# Altium PCB PCB2.PcbDoc (part 1 of 2)
Units mm, origin at the board's own origin, x right, y up, seen from the top; angles counter-clockwise.
Board outline 100 x 150 mm, 2 copper layers (Top Layer, Bottom Layer), stack 1.569 mm thick; 187 components, 138 nets, 678 pads, 332 vias.
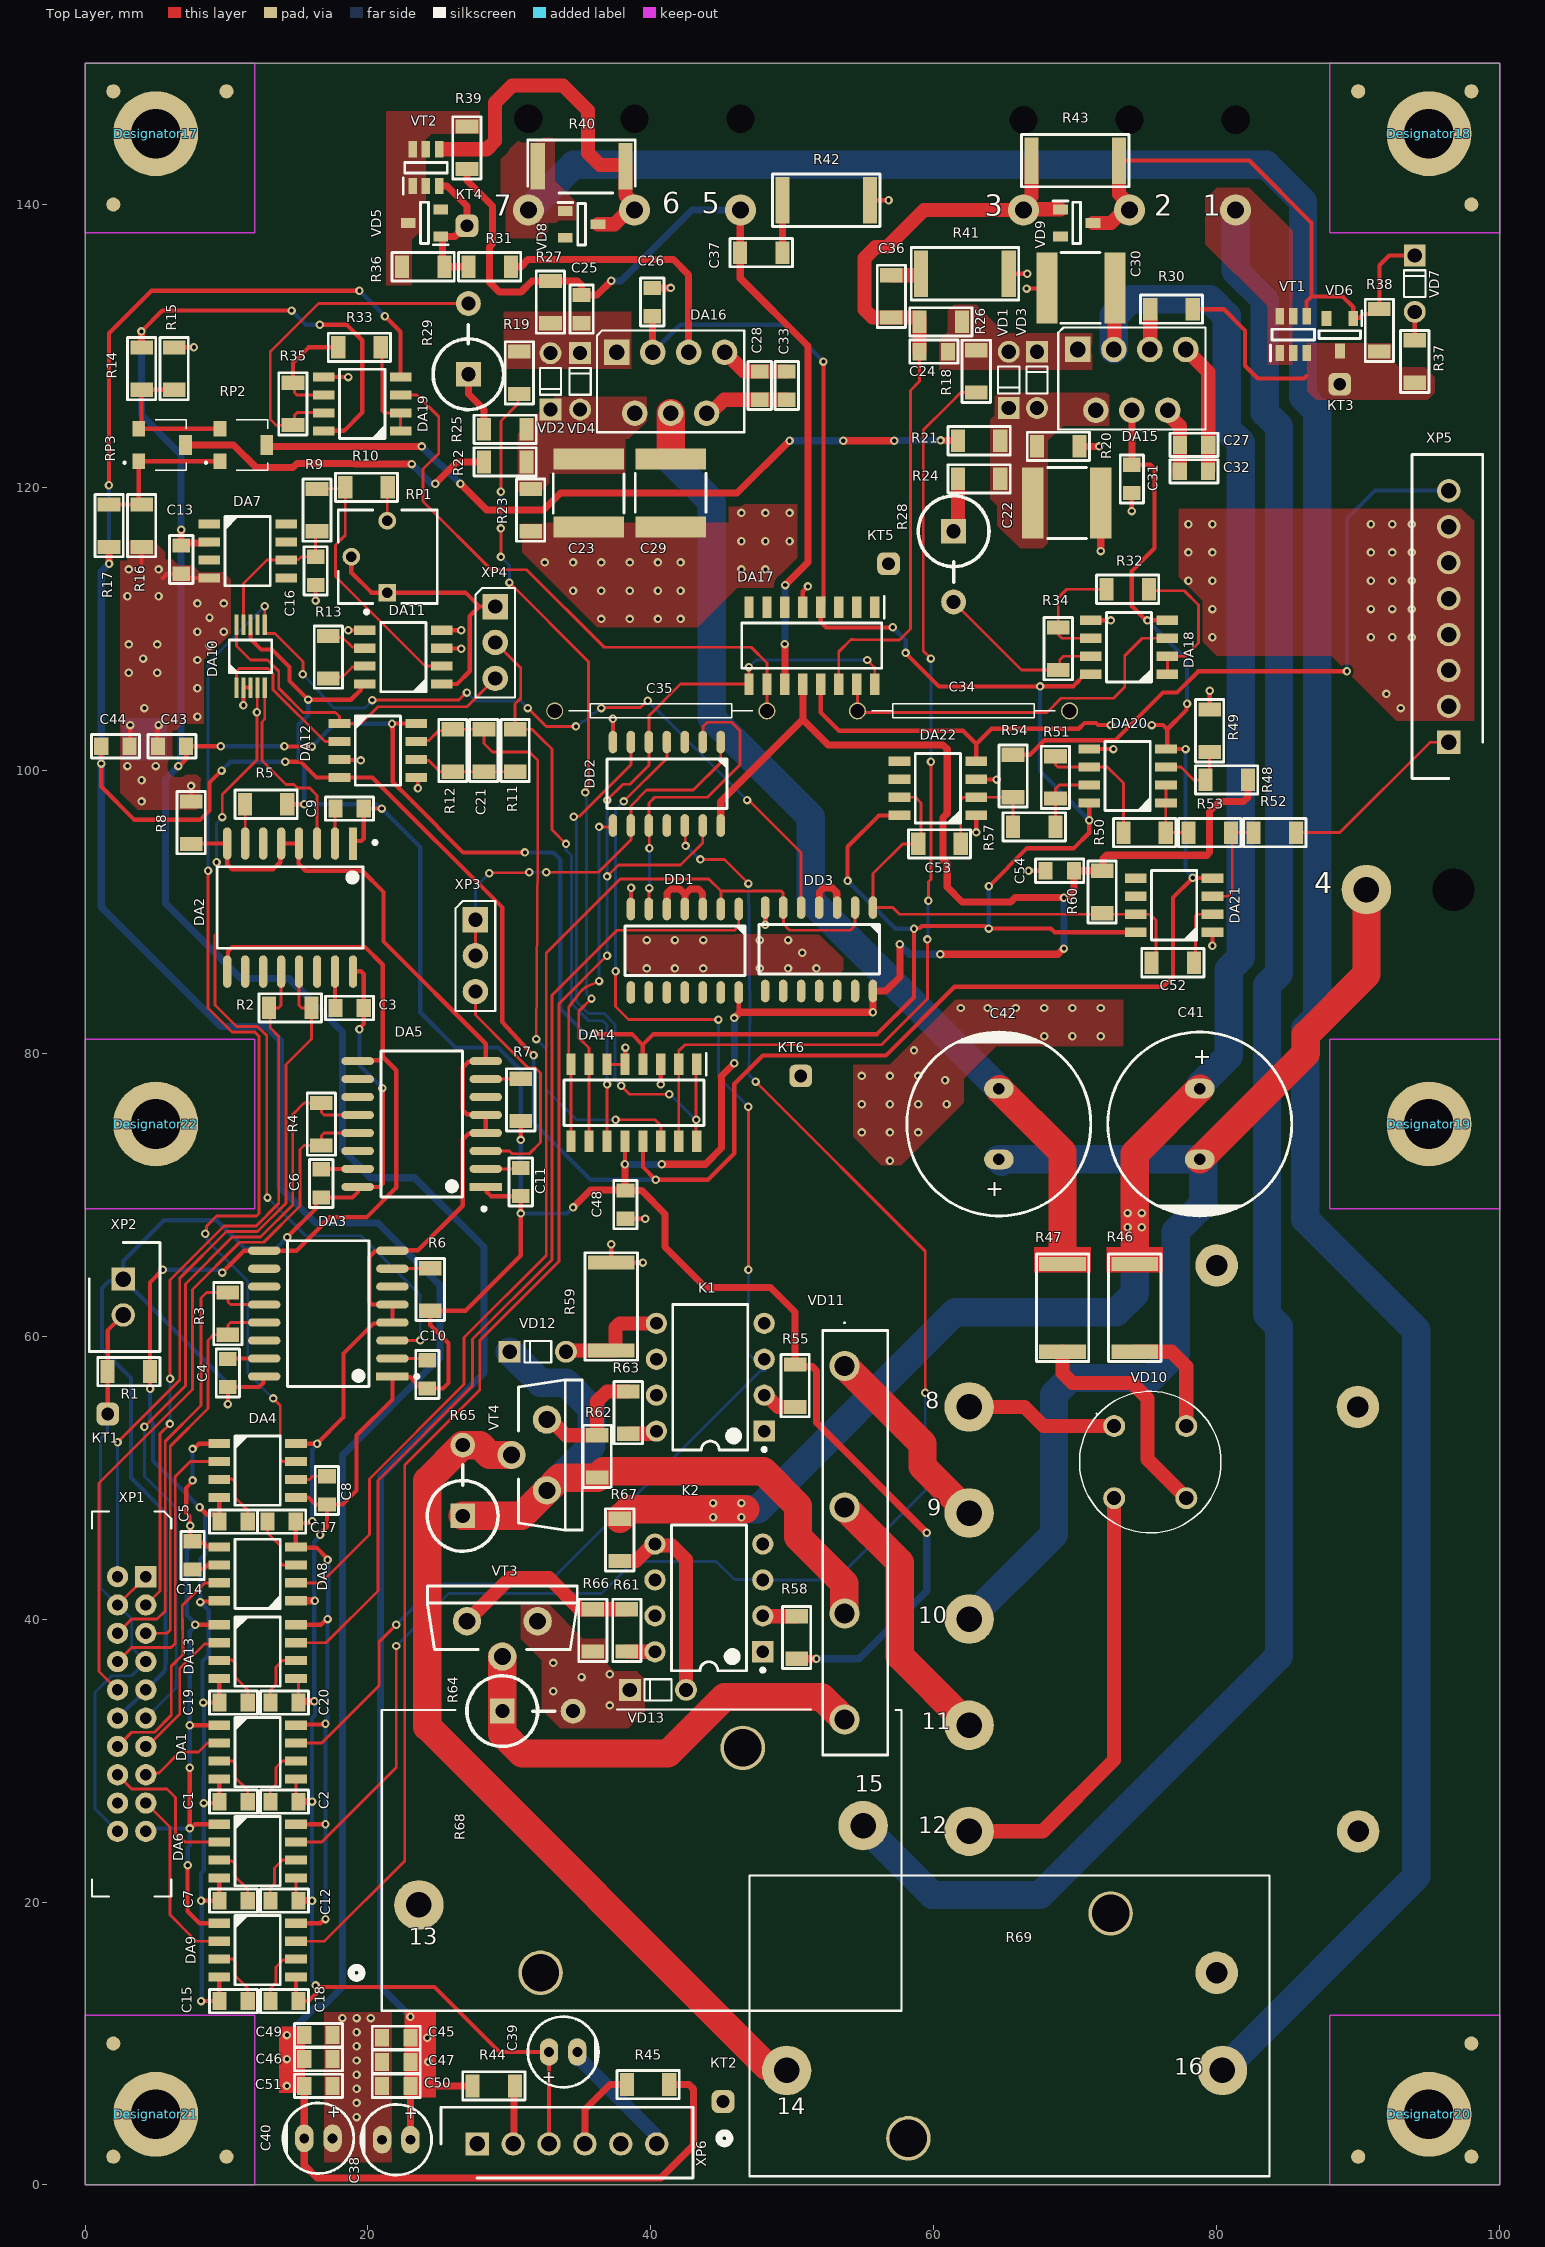
[diagram p0: Top Layer view]
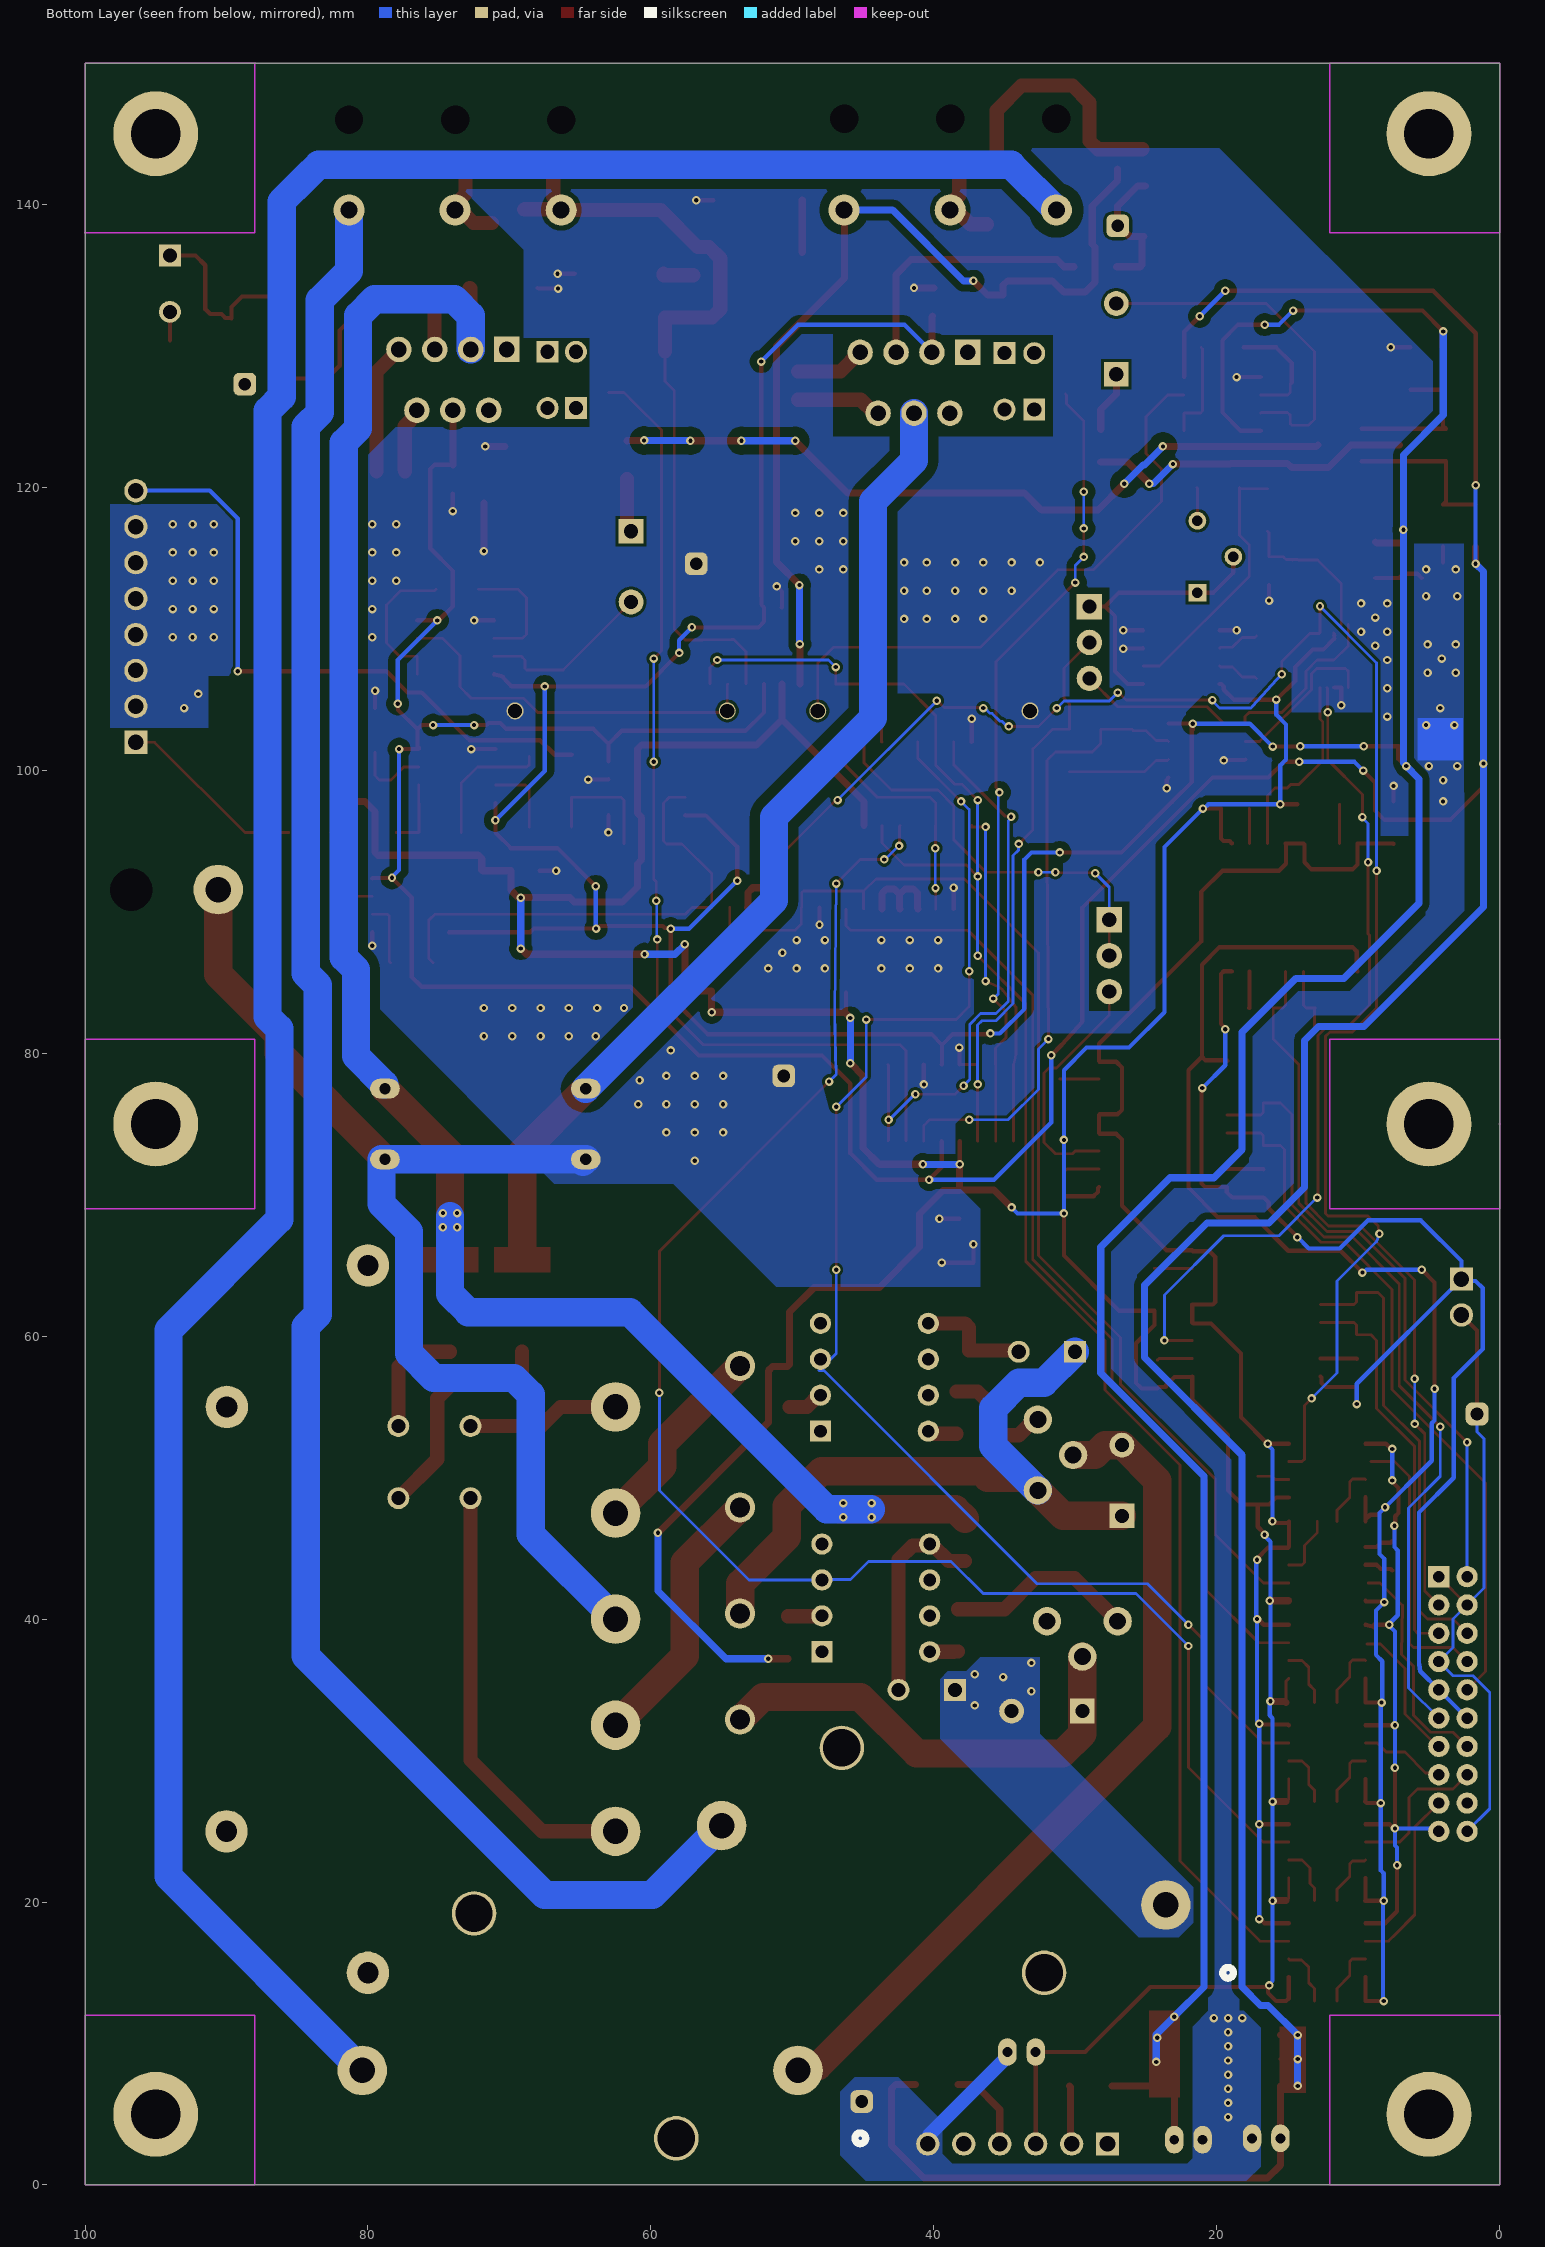
[diagram p1: Bottom Layer view, seen from below]
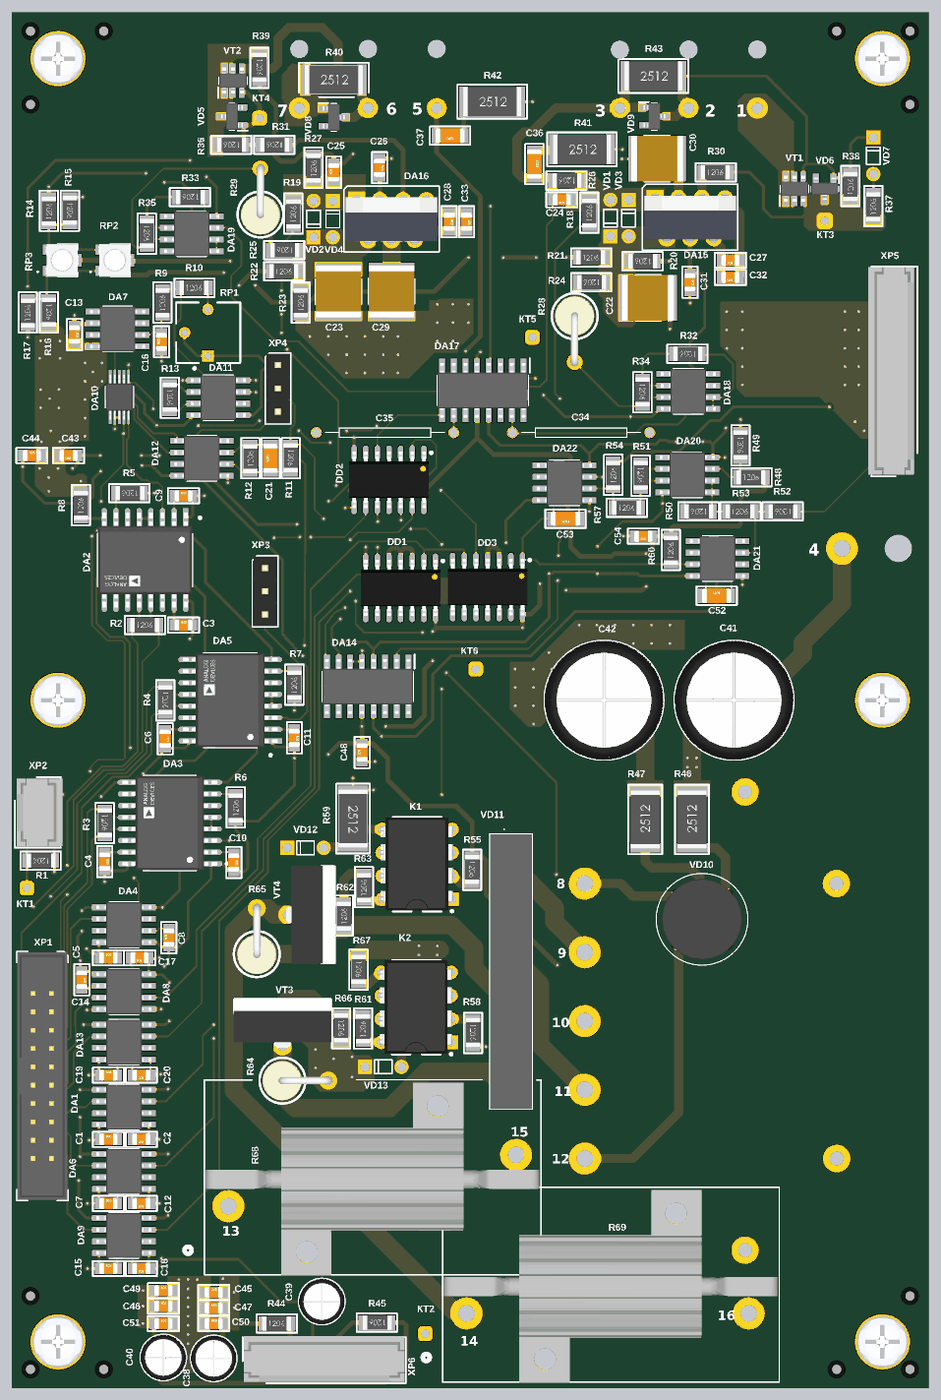
[diagram p3: 3D render of the assembled board from above, using the file's embedded part models]

## Layer stack, top to bottom
Top Solder: solder mask 0.0254, SM-001, Dk 4
Top Layer: signal copper 0.035
Dielectric 1: core 1.4986, Core-043, Dk 4.3
Bottom Layer: signal copper 0.035
Bottom Solder: solder mask 0.0254, SM-001, Dk 4

## Board outline
0,0 0,150 100,150 100,0

## Design rules (kind name [scope] priority, off if disabled: settings)
Clearance Clearance_1 [(InNet('-100') or InNet('-70') or InNet('+70') or InNet('+100')or InNet('NetR21_1'))] p1: gap=0.7 ignorepadtopadclearanceinfootprint=TRUE except(0.5: Arc-SMDPad Arc-THPad Track-SMDPad Track-THPad SMDPad-SMDPad SMDPad-THPad THPad-THPad)
Clearance Clearance_3 [InComponent('DA10')] p2: gap=0.2 ignorepadtopadclearanceinfootprint=TRUE
Clearance Clearance_2 [(InNet('+3.3n') or InNet('-15') or InNet('+5') or InNet('+15') or InNet('+5n')or InNet('Net5') or InNet('S-'))] p3: gap=0.5 ignorepadtopadclearanceinfootprint=TRUE except(0.3: Arc-SMDPad Track-SMDPad)
Clearance [All] p4: gap=0.15 ignorepadtopadclearanceinfootprint=TRUE except(0.2: Arc-Fill Arc-Poly Arc-Region Track-Fill Track-Poly Track-Region SMDPad-Fill SMDPad-Poly SMDPad-Region THPad-Fill THPad-Poly THPad-Region Via-Fill Via-Poly Via-Region Fill-Fill Fill-Poly Fill-Region Poly-Poly Poly-Region Region-Region)
Height [All] p1: minheight=0 maxheight=40 prefheight=12.7
HoleSize [All] p1: absolutevalues=TRUE maxlimit=5 minlimit=0.025 maxpercent=80.000 minpercent=20.000
MinimumSolderMaskSliver [All] p1: minsoldermaskwidth=0.1
PlaneClearance [All] p1: clearance=0.5
PlaneConnect [All] p1: planeconnectstyle=Direct reliefexpansion=0.508 reliefentries=4 reliefconductorwidth=0.254 reliefairgap=0.254
PolygonConnect [All] p1: connectstyle=Direct reliefconductorwidth=0.254 reliefentries=4 polygonreliefangle="90 Angle" airgapwidth=0.254
RoutingVias [All] p1: holewidth=0.3 width=0.6 viastyle="Through Hole" minholewidth=0.3 minwidth=0.6 maxholewidth=0.8 maxwidth=1.5
SilkToSilkClearance [All] p1: silktosilkclearance=0.1
SilkToSolderMaskClearance [IsPad] p1: minsilkscreentomaskgap=0.1 clearancetoexposedcopper=TRUE
SolderMaskExpansion [All] p1: expansion=0.102 istentingtop=FALSE
SupplyNets "Schematic Supply Nets_31" [InNet('70+')] p1: voltage=0.000
SupplyNets "Schematic Supply Nets_30" [InNet('LIMITn')] p2: voltage=0.000
SupplyNets "Schematic Supply Nets_29" [InNet('-70')] p3: voltage=0.000
SupplyNets "Schematic Supply Nets_28" [InNet('-15')] p4: voltage=0.000
SupplyNets "Schematic Supply Nets_27" [InNet('+3.3n')] p5: voltage=0.000
SupplyNets "Schematic Supply Nets_26" [InNet('IMPc')] p6: voltage=0.000
SupplyNets "Schematic Supply Nets_25" [InNet('50E+')] p7: voltage=0.000
SupplyNets "Schematic Supply Nets_24" [InNet('LM+')] p8: voltage=0.000
SupplyNets "Schematic Supply Nets_23" [InNet('CLK_DA2')] p9: voltage=0.000
SupplyNets "Schematic Supply Nets_22" [InNet('GNDR')] p10: voltage=0.000
SupplyNets "Schematic Supply Nets_21" [InNet('GNDN')] p11: voltage=0.000
SupplyNets "Schematic Supply Nets_20" [InNet('-100')] p12: voltage=0.000
SupplyNets "Schematic Supply Nets_19" [InNet('OVLI,2n')] p13: voltage=0.000
SupplyNets "Schematic Supply Nets_18" [InNet('OVLI,2')] p14: voltage=0.000
SupplyNets "Schematic Supply Nets_17" [InNet('DAT_DA2')] p15: voltage=0.000
SupplyNets "Schematic Supply Nets_16" [InNet('ENB_DA2')] p16: voltage=0.000
SupplyNets "Schematic Supply Nets_15" [InNet('50En+')] p17: voltage=0.000
SupplyNets "Schematic Supply Nets_14" [InNet('S-')] p18: voltage=0.000
SupplyNets "Schematic Supply Nets_13" [InNet('+15')] p19: voltage=0.000
SupplyNets "Schematic Supply Nets_12" [InNet('+70')] p20: voltage=0.000
SupplyNets "Schematic Supply Nets_11" [InNet('50En-')] p21: voltage=0.000
SupplyNets "Schematic Supply Nets_10" [InNet('EIMPn')] p22: voltage=0.000
SupplyNets "Schematic Supply Nets_9" [InNet('+5')] p23: voltage=0.000
SupplyNets "Schematic Supply Nets_8" [InNet('GND')] p24: voltage=0.000
SupplyNets "Schematic Supply Nets_7" [InNet('LIMIT')] p25: voltage=0.000
SupplyNets "Schematic Supply Nets_6" [InNet('+100')] p26: voltage=0.000
SupplyNets "Schematic Supply Nets_5" [InNet('LM-')] p27: voltage=0.000
SupplyNets "Schematic Supply Nets_4" [InNet('+5n')] p28: voltage=0.000
SupplyNets "Schematic Supply Nets_3" [InNet('EIMP')] p29: voltage=0.000
SupplyNets "Schematic Supply Nets_2" [InNet('S+')] p30: voltage=0.000
SupplyNets "Schematic Supply Nets_1" [InNet('70-')] p31: voltage=0.000
SupplyNets "Schematic Supply Nets" [InNet('50E-')] p32: voltage=0.000
Width [All] p1: maxlimit=2 minlimit=0.2 preferedwidth=0.3
23 further rules are at their usual default settings.

## Classes and differential pairs
component class Sheet3: 8 9 10 11 12 C38 C39 C40 C41 C42 C43 C44 C45 C46 C47 C48 C49 C50 C51 C52 C53 C54 DA20 DA21 DA22 DD3 K1 K2 R44 R45 R46 R47 R48 R49 R50 R51 R52 R53 R54 R55 R57 R58 R59 R60 R61 R62 R63 R64 R65 R66 R67 R68 R69 VD10 VD11 VD12 VD13 VT3 VT4 XP5 XP6 XS3 КТ5 КТ6
component class Sheet2: 1 2 3 4 5 6 7 C22 C23 C24 C25 C26 C27 C28 C29 C30 C31 C32 C33 C34 C35 C36 C37 DA15 DA16 DA17 DA18 DA19 R14 R15 R16 R17 R18 R19 R20 R21 R22 R23 R24 R25 R26 R27 R28 R29 R30 R31 R32 R33 R34 R35 R36 R37 R38 R39 R40 R41 R42 R43 RP2 RP3 VD1 VD2 VD3 VD4 VD5 VD6 VD7 VD8 VD9 VT1 VT2 КТ3 КТ4
component class Sheet1: C1 C2 C3 C4 C5 C6 C7 C8 C9 C10 C11 C12 C13 C14 C15 C16 C17 C18 C19 C20 C21 DA1 DA2 DA3 DA4 DA5 DA6 DA7 DA8 DA9 DA10 DA11 DA12 DA13 DA14 DD1 DD2 R1 R2 R3 R4 R5 R6 R7 R8 R9 R10 R11 R12 R13 RP1 XP1 XP2 XP3 XP4 XS1 XS2 КТ1 КТ2

## Components (designator, comment, footprint, x,y, rotation, side; value= is the part's Value field where it differs from the comment)
C1 "0805-X7R-25 В-0,1 мкФ +-10%" "CAP: 0805" 10.5,27.1 r0 top value="0,1 мкФ"
C2 "0805-X7R-25 В-0,1 мкФ +-10%" "CAP: 0805" 14.1,27.1 r180 top value="0,1 мкФ"
C3 "0805-X7R-25 В-0,1 мкФ +-10%" "CAP: 0805" 18.7,83.2 r0 top value="0,1 мкФ"
C4 "0805-X7R-25 В-0,1 мкФ +-10%" "CAP: 0805" 10.1,57.4 r270 top value="0,1 мкФ"
C5 "0805-X7R-25 В-0,1 мкФ +-10%" "CAP: 0805" 10.5,46.9 r0 top value="0,1 мкФ"
C6 "0805-X7R-25 В-0,1 мкФ +-10%" "CAP: 0805" 16.7,70.8 r270 top value="0,1 мкФ"
C7 "0805-X7R-25 В-0,1 мкФ +-10%" "CAP: 0805" 10.5,20.1 r0 top value="0,1 мкФ"
C8 "0805-X7R-25 В-0,1 мкФ +-10%" "CAP: 0805" 17.1,49.1 r90 top value="0,1 мкФ"
C9 "0805-X7R-25 В-0,1 мкФ +-10%" "CAP: 0805" 18.7,97.3 r0 top value="0,1 мкФ"
C10 "0805-X7R-25 В-0,1 мкФ +-10%" "CAP: 0805" 24.2,57.3 r270 top value="0,1 мкФ"
C11 "0805-X7R-25 В-0,1 мкФ +-10%" "CAP: 0805" 30.8,70.9 r270 top value="0,1 мкФ"
C12 "0805-X7R-25 В-0,1 мкФ +-10%" "CAP: 0805" 14.1,20.1 r180 top value="0,1 мкФ"
C13 "0805-X7R-25 В-0,1 мкФ +-10%" "CAP: 0805" 6.8,114.9 r270 top value="0,1 мкФ"
C14 "0805-X7R-25 В-0,1 мкФ +-10%" "CAP: 0805" 7.6,44.5 r270 top value="0,1 мкФ"
C15 "0805-X7R-25 В-0,1 мкФ +-10%" "CAP: 0805" 10.5,13 r0 top value="0,1 мкФ"
C16 "0805-X7R-25 В-0,1 мкФ +-10%" "CAP: 0805" 16.3,114.1 r90 top value="0,1 мкФ"
C17 "0805-X7R-25 В-0,1 мкФ +-10%" "CAP: 0805" 13.9,46.9 r180 top value="0,1 мкФ"
C18 "0805-X7R-25 В-0,1 мкФ +-10%" "CAP: 0805" 14.1,13 r180 top value="0,1 мкФ"
C19 "0805-X7R-25 В-0,1 мкФ +-10%" "CAP: 0805" 10.5,34.1 r0 top value="0,1 мкФ"
C20 "0805-X7R-25 В-0,1 мкФ +-10%" "CAP: 0805" 14.1,34.1 r180 top value="0,1 мкФ"
C21 "1206-C0G-50 В-22 пФ +-5%" "CAP: 1206" 28.2,101.4 r90 top value="22 пФ"
C22 "2220-X7R-250 В-1 мкФ +-10%" "CAP: 2220" 71.8,118.9 r270 top value="1 мкФ"
C23 "2220-X7R-250 В-1 мкФ +-10%" "CAP: 2220" 35.6,117.2 r180 top value="1 мкФ"
C24 "0805-C0G-250 В-10 пФ +-5%" "CAP: 0805" 60,129.6 r180 top value="10 пФ"
C25 "0805-C0G-250 В-10 пФ +-5%" "CAP: 0805" 35.1,132.6 r90 top value="10 пФ"
C26 "0805-X7R-25 В-1 мкФ +-10%" "CAP: 0805" 40.1,133.1 r270 top value="1 мкФ"
C27 "0805-C0G-250 В-10 пФ +-5%" "CAP: 0805" 78.4,123 r180 top value="10 пФ"
C28 "0805-C0G-250 В-10 пФ +-5%" "CAP: 0805" 47.7,127.2 r270 top value="10 пФ"
C29 "2220-X7R-250 В-1 мкФ +-10%" "CAP: 2220" 41.4,122 r0 top value="1 мкФ"
C30 "2220-X7R-250 В-1 мкФ +-10%" "CAP: 2220" 68,134.1 r90 top value="1 мкФ"
C31 "0805-X7R-25 В-1 мкФ +-10%" "CAP: 0805" 74,120.6 r270 top value="1 мкФ"
C32 "0805-C0G-250 В-10 пФ +-5%" "CAP: 0805" 78.39,121.133 r180 top value="10 пФ"
C33 "0805-C0G-250 В-10 пФ +-5%" "CAP: 0805" 49.6,127.2 r270 top value="10 пФ"
C34 "К73-17-160 В-1 мкФ +-10%" К73-17-A15 69.6,104.2 r180 top
C35 "К73-17-160 В-1 мкФ +-10%" К73-17-A15 33.2,104.2 r0 top
C36 "1206-X7R-250 B-0,1 мкФ+-10%" "CAP: 1206" 57,133.5 r270 top value="2,2 пФ"
C37 "1206-X7R-250 B-0,1 мкФ+-10%" "CAP: 1206" 47.8,136.6 r180 top value="2,2 пФ"
C38 "ECR4R7M50B" "CAP TH ALUM ELEC D5.00mm S2.00mm H11.00mm" 22,3.2 r0 top value="4,7 мкФ"
C39 "ECR4R7M50B" "CAP TH ALUM ELEC D5.00mm S2.00mm H11.00mm" 33.8,9.4 r180 top value="4,7 мкФ"
C40 "ECR4R7M50B" "CAP TH ALUM ELEC D5.00mm S2.00mm H11.00mm" 16.5,3.3 r0 top value="4,7 мкФ"
C41 "EHR-250B-47 мкФ" "CAP TH ALUM ELEC D13.00mm S5.00mm H26.50mm" 78.8,75 r270 top
C42 "EHR-250B-47 мкФ" "CAP TH ALUM ELEC D13.00mm S5.00mm H26.50mm" 64.6,75 r90 top
C43 "0805-X7R-25 В-0,33 мкФ +-10%" "CAP: 0805" 6.15,101.7 r180 top value="0,33 мкФ"
C44 "0805-X7R-25 В-0,33 мкФ +-10%" "CAP: 0805" 2.15,101.7 r0 top value="0,33 мкФ"
C45 "0805-X7R-25 В-0,33 мкФ +-10%" "CAP: 0805" 22,10.4 r0 top value="0,33 мкФ"
C46 "0805-X7R-25 В-0,33 мкФ +-10%" "CAP: 0805" 16.5,8.9 r0 top value="0,33 мкФ"
C47 "0805-X7R-25 В-0,33 мкФ +-10%" "CAP: 0805" 22,8.7 r0 top value="0,33 мкФ"
C48 "0805-X7R-25 В-0,33 мкФ +-10%" "CAP: 0805" 38.2,69.3 r90 top value="0,33 мкФ"
C49 "0805-X7R-25 В-0,33 мкФ +-10%" "CAP: 0805" 16.5,10.6 r0 top value="0,33 мкФ"
C50 "0805-X7R-25 В-0,33 мкФ +-10%" "CAP: 0805" 22,7 r0 top value="0,33 мкФ"
C51 "0805-X7R-25 В-0,33 мкФ +-10%" "CAP: 0805" 16.5,7 r0 top value="0,33 мкФ"
C52 "1206-X7R-50 B-22 пФ+-10%" "CAP: 1206" 76.9,86.4 r0 top value="2,2 пФ"
C53 "1206-X7R-50 B-22 пФ+-10%" "CAP: 1206" 60.4,94.8 r180 top value="2,2 пФ"
C54 "0805-X7R-25 В-0,33 мкФ +-10%" "CAP: 0805" 68.9,92.9 r180 top value="0,33 мкФ"
DA1 "ADuM1100AR" 8-SOIC 12.2,30.6 r0 top
DA2 "ADM2486BRWZ" "16-SOIC W" 14.5,90.3 r270 top
DA3 "ADM2486BRWZ" "16-SOIC W" 17.2,61.6 r180 top
DA4 "ADuM1100AR" 8-SOIC 12.2,50.5 r0 top
DA5 "ADM2486BRWZ" "16-SOIC W" 23.8,75 r180 top
DA6 "ADuM1100AR" 8-SOIC 12.2,23.6 r0 top
DA7 "ADR435BRZ" 8-SOIC 11.5,115.5 r0 top
DA8 "ADuM1100AR" 8-SOIC 12.2,43.2 r180 top
DA9 "ADuM1100AR" 8-SOIC 12.2,16.6 r0 top
DA10 "AD5443YRM" 10-MSOP 11.7,108.075 r90 top
DA11 "ADA4084-2ARZ" 8-SOIC 22.5,108 r180 top
DA12 "ADA4084-2ARZ" 8-SOIC 20.7,101.4 r0 top
DA13 "ADuM1100AR" 8-SOIC 12.2,37.7 r0 top
DA14 "ADG433BR" 16-SOIC 38.8,76.5 r270 top
DA15 "PA340CC" "D2PAK (TO263-7-1)" 74,127.7 r0 top
DA16 "PA340CC" "D2PAK (TO263-7-1)" 41.4,127.5 r0 top
DA17 "ADG433BR" 16-SOIC 51.375,108.812 r270 top
DA18 "AD823ARZ" 8-SOIC 73.8,108.7 r180 top
DA19 "AD823ARZ" 8-SOIC 19.6,125.9 r180 top
DA20 "ADA4084-2ARZ" 8-SOIC 73.7,99.6 r180 top
DA21 "IL311D" 8-SOIC 76.988,90.465 r180 top
DA22 "IL311D" 8-SOIC 60.288,98.735 r180 top
DD1 "IN74HC00AD" 14-soic 46.21,90.2 r270 top
DD2 "IN74HC20D" 14-SOIC 44.94,102 r270 top
DD3 "IN74HC00AD" 14-soic 55.7,90.3 r270 top
Designator17 "Comment" Screw_M3 5,145 r180 top
Designator18 "Comment" Screw_M3 95,145 r180 top
Designator19 "Comment" Screw_M3 95,75 r180 top
Designator20 "Comment" Screw_M3 95,5 r180 top
Designator21 "Comment" Screw_M3 5,5 r180 top
Designator22 "Comment" Screw_M3 5,75 r180 top
K1 "TLP3549F" 8-DIP 44.2,57.1 r180 top
K2 "TLP3549F" 8-DIP 44.1,41.5 r180 top
R1 "1206-10 Ом+-5%" 1206 3.1,57.5 r180 top value="10 Ом"
R2 "1206-100 Ом+-5%" 1206 14.508,83.208 r0 top value="100 Ом"
R3 "1206-100 Ом+-5%" 1206 10.1,61.6 r270 top value="100 Ом"
R4 "1206-100 Ом+-5%" 1206 16.708,74.992 r270 top value="100 Ом"
R5 "1206-12 кОм+-5%" 1206 12.8,97.6 r180 top value="12 кОм"
R6 "1206-12 кОм+-5%" 1206 24.4,63.3 r90 top value="12 кОм"
R7 "1206-12 кОм+-5%" 1206 30.8,76.7 r90 top value="12 кОм"
R8 "1206-10 Ом+-5%" 1206 7.5,96.3 r90 top value="10 Ом"
R9 "1206-10 кОм+-0,5%" 1206 16.4,118.4 r90 top value="10 кОм"
R10 "1206-100 Ом+-0,5%" 1206 19.9,120 r0 top value="100 Ом"
R11 "1206-10 кОм+-0,5%" 1206 30.4,101.4 r270 top value="10 кОм"
R12 "1206-10 кОм+-0,5%" 1206 26,101.4 r90 top value="10 кОм"
R13 "1206-12 кОм+-1%" 1206 17.2,108 r270 top value="12 кОм"
R14 "1206-15 кОм+-5%" 1206 4,128.4 r90 top value="15 кОм"
R15 "1206-51 Ом+-5%" 1206 6.3,128.4 r270 top value="51 Ом"
R16 "1206-51 Ом+-5%" 1206 4,117.3 r270 top value="51 Ом"
R17 "1206-51 кОм+-5%" 1206 1.7,117.3 r90 top value="51 кОм"
R18 "1206-2 кОм+-0.5%" 1206 63,128.2 r90 top value="2 кОм"
R19 "1206-2 кОм+-0.5%" 1206 30.7,128.1 r90 top value="2 кОм"
R20 "1206-2 кОм+-0.5%" 1206 68.8,122.9 r180 top value="2 кОм"
R21 "1206-2 кОм+-0.5%" 1206 63.2,123.3 r0 top value="2 кОм"
R22 "1206-2 кОм+-0.5%" 1206 29.7,121.8 r0 top value="2 кОм"
R23 "1206-2 кОм+-0.5%" 1206 31.5,118.4 r90 top value="2 кОм"
R24 "1206-10 кОм+-0,5%" 1206 63.2,120.6 r180 top value="10 кОм"
R25 "1206-10 кОм+-0,5%" 1206 29.7,124.1 r180 top value="10 кОм"
R26 "1206-20 кОм+-0.5%" 1206 60.5,131.7 r180 top value="20 кОм"
R27 "1206-20 кОм+-0.5%" 1206 32.9,133.1 r90 top value="20 кОм"
R28 "С2-33Н-0,125-1,5 кОм +-5%" RES_AXIAL_VERTICAL_5mm 61.4,114.4 r270 top
R29 "С2-33Н-0,125-1,5 кОм +-5%" RES_AXIAL_VERTICAL_5mm 27.1,130.5 r90 top
R30 "1206-2,4 кОм+-5%" 1206 76.8,132.6 r0 top value="2,4 кОм"
R31 "1206-2,4 кОм+-5%" 1206 28.6,135.6 r180 top value="2,4 кОм"
R32 "1206-20 кОм+-0.5%" 1206 73.7,112.8 r180 top value="20 кОм"
R33 "1206-20 кОм+-0.5%" 1206 19.4,129.9 r180 top value="20 кОм"
R34 "1206-20 кОм+-0.5%" 1206 68.8,108.6 r270 top value="20 кОм"
R35 "1206-20 кОм+-0.5%" 1206 14.7,125.9 r270 top value="20 кОм"
R36 "1206-2,4 кОм+-5%" 1206 23.9,135.6 r180 top value="2,4 кОм"
R37 "1206-51 Ом+-5%" 1206 94,128.9 r90 top value="51 Ом"
R38 "1206-2,4 кОм+-5%" 1206 91.5,131.1 r90 top value="2,4 кОм"
R39 "1206-51 Ом+-5%" 1206 27,144 r270 top value="51 Ом"
R40 "2512-51 Ом+-5%" 2512 35.1,142.7 r0 top value="51 Ом"
R41 "2512-51 Ом+-5%" 2512 62.2,135.1 r0 top value="51 Ом"
R42 "2512-51 Ом+-5%" 2512 52.4,140.3 r0 top value="51 Ом"
R43 "2512-51 Ом+-5%" 2512 70,143.1 r0 top value="51 Ом"
R44 "1206-2,2 Ом+-5%" 1206 28.9,7 r0 top value="2,2 кОм"
R45 "1206-2,2 Ом+-5%" 1206 39.8,7.1 r180 top value="2,2 кОм"
R46 "2512-1,2 кОм+-5%" 2512 74.2,62 r90 top value="1,2 кОм"
R47 "2512-1,2 кОм+-5%" 2512 69.1,62 r90 top value="1,2 кОм"
R48 "1206-6,98 кОм+-1%" 1206 80.7,99.325 r0 top value="6,98 кОм"
R49 "1206-1 кОм+-5%" 1206 79.5,102.8 r270 top value="1 кОм"
R50 "1206-2 кОм+-0.5%" 1206 74.9,95.6 r180 top value="2 кОм"
R51 "1206-2 кОм+-0.5%" 1206 68.6,99.5 r270 top value="2 кОм"
R52 "1206-240 Ом+-5%" 1206 84.1,95.6 r180 top value="240 Ом"
R53 "1206-240 Ом+-5%" 1206 79.5,95.6 r0 top value="240 Ом"
R54 "1206-240 Ом+-5%" 1206 65.6,99.6 r90 top value="240 Ом"
R55 "1206-430 Ом+-5%" 1206 50.2,56.5 r270 top value="430 Ом"
R57 "1206-240 Ом+-5%" 1206 67.1,96 r0 top value="240 Ом"
R58 "1206-430 Ом+-5%" 1206 50.3,38.7 r270 top value="430 Ом"
R59 "2512-5,6 кОм+-5%" 2512 37.2,62.1 r270 top value="5,6 кОм"
R60 "1206-2 кОм+-5%" 1206 71.9,91.4 r90 top value="2 кОм"
R61 "1206-390 Ом+-5%" 1206 38.3,39.2 r90 top value="390 Ом"
R62 "1206-51 кОм+-5%" 1206 36.2,51.5 r90 top value="51 кОм"
R63 "1206-390 Ом+-5%" 1206 38.4,54.6 r90 top value="390 Ом"
R64 "W21-3W-680 Ом +-5%" RES_AXIAL_VERTICAL_5mm 32,33.5 r0 top
R65 "W21-3W-680 Ом +-5%" RES_AXIAL_VERTICAL_5mm 26.7,49.8 r90 top
R66 "1206-51 кОм+-5%" 1206 35.9,39.2 r270 top value="51 кОм"
R67 "1206-2,7 кОм+-5%" 1206 37.8,45.6 r270 top value="2,7 кОм"
R68 "HS15-4R7-J" HS15#1 32.2,15 r0 top value="4,7 Ом"
R69 "HS15-4R7-J" HS15#2 58.2,3.3 r0 top value="4,7 Ом"
RP1 "3362P-1-103LF" BOUR-3362P 21.4,115.1 r90 top
RP2 "PVG3A102C01R00" PVG3A 11.2,123 r270 top
RP3 "PVG3A102C01R00" PVG3A 5.45,123 r270 top
VD1 "1N4148" "DO-35 vertical" 65.3,127.6 r90 top
VD2 "1N4148" "DO-35 vertical" 32.9,127.5 r90 top
VD3 "1N4148" "DO-35 vertical" 67.3,127.6 r270 top
VD4 "1N4148" "DO-35 vertical" 35,127.5 r270 top
VD5 "BZX84C15LT1G" SOT-23-3 24,138.7 r180 top
VD6 "BZX84C15LT1G" SOT-23-3 88.7,130.8 r270 top
VD7 "1N4148" "DO-35 vertical" 94,134.4 r270 top
VD8 "BZX84C15LT1G" SOT-23-3 35.1,138.6 r0 top
VD9 "BZX84C15LT1G" SOT-23-3 70.1,138.7 r0 top
VD10 "W04M" WOM 75.3,51.1 r270 top
VD11 "GSIB2540" GSIB-5S 53.7,57.9 r270 top
VD12 "BZX79-C10V" "DO-35 vertical" 32.01,58.9 r0 top
VD13 "BZX79-C10V" "DO-35 vertical" 40.5,35 r0 top
VT1 "ZXMN10A08E6TA" SOT-23-6 85.4,130.8 r90 top
VT2 "ZXMP10A17E6TA" SOT-23-6 24.1,142.6 r90 top
VT3 "IPA083N10N5XKSA1" TO-220_HV_FET 29.5,38.6 r0 top
VT4 "IPA083N10N5XKSA1" TO-220_HV_FET 31.4,51.6 r270 top
XP1 "BH2-20" DS1014-20 3.3,34 r270 top
XP2 "280370-2" 280370-2 2.7,64.04 r270 top
XP3 "DS1021-1x3" 3X2.54 27.6,86.9 r270 top
XP4 "DS1021-1x3" 3X2.54 29,109.04 r270 top
XP5 "280373-2" 280373-2 96.4,101.98 r90 top
XP6 "280372-2" 280372-2 27.72,2.9 r0 top
КТ1 "Lepestok" LEPESTOK7750224 1.6,54.5 r90 top
КТ2 "Lepestok" LEPESTOK7750224 45.1,5.9 r270 top
КТ3 "Lepestok" LEPESTOK7750224 88.7,127.3 r180 top
КТ4 "Lepestok" LEPESTOK7750224 27,138.5 r270 top
КТ5 "Lepestok" LEPESTOK7750224 56.8,114.6 r180 top
КТ6 "Lepestok" LEPESTOK7750224 50.6,78.4 r180 top

## Footprints (in the part's own frame and the unit in brackets; to place one, negate y for a bottom-side part, rotate by r counter-clockwise, add the part's x,y. Pads: shape width x height; smd on the part's side, far side on the other; paste and mask are expansions set on the pad)
3X2.54 [mm]
  rect 1.8x1.8 hole 1: 1(-2.54,0)
  round 1.8 hole 1: 2(0,0) 3(2.54,0)
  silkscreen extent -3.86,-1.4 3.9,1.4, body extent -3.79,-1.26 3.83,1.28, height 8.54
8-DIP [mm] "DIP, 8-Pin, Row Spacing 7.62 mm, Pitch 2.54 mm"
  rect 1.5x1.5 hole 0.9: 1(-3.81,3.81)
  round 1.5 hole 0.9: 2(-3.81,1.27) 3(-3.81,-1.27) 4(-3.81,-3.81) 5(3.81,-3.81) 6(3.81,-1.27) 7(3.81,1.27) 8(3.81,3.81)
  silkscreen extent -3.94,-5.15 2.65,5.23, body extent -3.91,-5.12 3.96,5.04, height 5.33
8-SOIC [mm] "Body 3.9mmx4.9mm 1.27 pitch"
  rect 1.525x0.65 smd: 1(-2.712,1.905) 2(-2.712,0.635) 3(-2.712,-0.635) 4(-2.712,-1.905) 5(2.712,-1.905) 6(2.712,-0.635) 7(2.712,0.635) 8(2.712,1.905)
  silkscreen extent -1.6,-2.45 1.6,2.45, body extent -3,-2.45 3,2.45, height 1.75
10-MSOP [mm] "3x3 mm, pitch 0.5 mm"
  rect 1.45x0.3 smd mask+0.05: 1(-2.225,1) 2(-2.225,0.5) 3(-2.225,0) 4(-2.225,-0.5) 5(-2.225,-1) 6(2.225,-1) 7(2.225,-0.5) 8(2.225,0) 9(2.225,0.5) 10(2.225,1)
  silkscreen extent -1.15,-1.5 1.15,1.5, body extent -2.45,-1.5 2.45,1.5, height 0.95
14-soic [mm] "Body 8.6x3.9mm, pitch 1.27 mm"
  rrect100% 1.6x0.6 smd: 1(0,0) 2(0,-1.27) 3(0,-2.54) 4(0,-3.81) 5(0,-5.08) 6(0,-6.35) 7(0,-7.62) 8(5.9,-7.62) 9(5.9,-6.35) 10(5.9,-5.08) 11(5.9,-3.81) 12(5.9,-2.54) 13(5.9,-1.27) 14(5.9,0)
  rrect100% 0.5x0.5 on Top Overlay: ""(0,0.8)
  round 0.5 on Mech1: ""(0.5,0)
  silkscreen extent 1.2,-8.05 4.7,0.45, body extent -0.12,-8.15 6.02,0.55, height 1.78
14-SOIC [mm] "Body 8.6x3.9mm, pitch 1.27 mm"
  rrect100% 1.6x0.6 smd: 1(0,0) 2(0,-1.27) 3(0,-2.54) 4(0,-3.81) 5(0,-5.08) 6(0,-6.35) 7(0,-7.62) 8(5.9,-7.62) 9(5.9,-6.35) 10(5.9,-5.08) 11(5.9,-3.81) 12(5.9,-2.54) 13(5.9,-1.27) 14(5.9,0)
  rrect100% 0.5x0.5 on Top Overlay: ""(0,0.8)
  round 0.5 on Mech1: ""(0.5,0)
  silkscreen extent 1.2,-8.05 4.7,0.45, body extent -0.12,-8.15 6.02,0.55, height 1.78
16-SOIC [mm] "1,27 pitch 6x9,9mm"
  rect 1.525x0.65 smd: 1(-2.712,4.445) 2(-2.712,3.175) 3(-2.712,1.905) 4(-2.712,0.635) 5(-2.712,-0.635) 6(-2.712,-1.905) 7(-2.712,-3.175) 8(-2.712,-4.445) 9(2.712,-4.445) 10(2.712,-3.175) 11(2.712,-1.905) 12(2.712,-0.635) 13(2.712,0.635) 14(2.712,1.905) 15(2.712,3.175) 16(2.712,4.445)
  silkscreen extent -3.47,-4.95 1.6,5.12, body extent -3,-4.95 3,4.95, height 1.75
"16-SOIC W" [mm]
  rect 2.298x0.582 smd paste+0 mask+0.05: 1(-4.528,4.445)
  rrect100% 2.298x0.582 smd paste+0 mask+0.05: 2(-4.528,3.175) 3(-4.528,1.905) 4(-4.528,0.635) 5(-4.528,-0.635) 6(-4.528,-1.905) 7(-4.528,-3.175) 8(-4.528,-4.445) 9(4.528,-4.445) 10(4.528,-3.175) 11(4.528,-1.905) 12(4.528,-0.635) 13(4.528,0.635) 14(4.528,1.905) 15(4.528,3.175) 16(4.528,4.445)
  silkscreen extent -4.72,-5.15 2.88,6.12, body extent -5.93,-5.4 5.93,5.4, height 0.25
1206 [mm] "Resistor SMD"
  rect 1x1.6 smd: 1(-1.5,0) 2(1.5,0)
  silkscreen extent -2.2,-1 2.2,1, body extent -1.65,-0.8 1.55,0.8, height 0.47
2512 [mm] "Resistor SMD"
  rect 1x3.3 smd: 1(-3.1,0) 2(3.1,0)
  silkscreen extent -3.8,-1.4 3.8,1.85, body extent -3.17,-1.6 3.17,1.6, height 0.52
280370-2 [mm] "AMPMODU 2"
  rect 1.65x1.65 hole 1.1: 1(0,0)
  round 1.65 hole 1.1: 2(2.54,0)
  silkscreen extent -2.58,-2.4 5.12,2.6, body extent -2.41,-2.2 4.95,2.8, height 12.6
280372-2 [mm] "AMPMODU 2"
  rect 1.65x1.65 hole 1.1: 1(0,0)
  round 1.65 hole 1.1: 2(2.54,0) 3(5.08,0) 4(7.62,0) 5(10.16,0) 6(12.7,0)
  silkscreen extent -2.55,-2.4 15.25,2.6, body extent -2.41,-2.26 15.11,2.74, height 12.6
280373-2 [mm] "AMPMODU 2"
  rect 1.65x1.65 hole 1.1: 1(0,0)
  round 1.65 hole 1.1: 2(2.54,0) 3(5.08,0) 4(7.62,0) 5(10.16,0) 6(12.7,0) 7(15.24,0) 8(17.78,0)
  silkscreen extent -2.56,-2.4 20.34,2.6, body extent -2.35,-2.06 20.25,2.94, height 12.6
BOUR-3362P [mm] "THD, 3-Leads, Body 6.6x6.99mm, Pitch 2.54mm"
  rect 1.25x1.25 hole 0.75: 1(-2.54,0.035)
  round 1.25 hole 0.75: 2(0,2.575) 3(2.54,0.035)
  silkscreen extent -4.02,-3.49 3.3,3.5, body extent -3.3,-3.49 3.3,3.49, height 4.95
"CAP TH ALUM ELEC D5.00mm S2.00mm H11.00mm" [mm] "5mm Diameter 2mm Lead Spacing Aluminum Electrolytic Capacitors Radial, Can"
  oval 1.3x1.95 hole 0.7: 1(1,0) 2(-1,0)
  silkscreen extent -2.5,-2.5 2.5,2.5, body extent -2.51,-2.5 2.5,2.5, height 11
"CAP TH ALUM ELEC D13.00mm S5.00mm H26.50mm" [mm] "13mm Diameter 5mm Lead Spacing Aluminum Electrolytic Capacitors Radial, Can"
  oval 1.4x2.1 hole 0.8: 1(2.5,0) 2(-2.5,0)
  silkscreen extent -6.5,-6.5 6.5,6.5, body extent -6.51,-6.5 6.5,6.5, height 26.5
"CAP: 0805" [mm]
  rect 1x1.25 smd: 1(-1,0) 2(1,0)
  silkscreen extent -1.7,-0.82 1.7,0.82, body extent -1,-0.62 1,0.63, height 0.78
"CAP: 1206" [mm]
  rect 1x1.6 smd: 1(-1.5,0) 2(1.5,0)
  silkscreen extent -2.2,-1 2.2,1, body extent -1.6,-0.8 1.6,0.8, height 1
"CAP: 2220" [mm]
  rect 5x1.5 smd: 1(0,0) 2(0,-4.8)
  silkscreen extent -2.5,-3.75 2.5,-1, body extent -2.5,-5.25 2.5,0.45, height 2.3
"D2PAK (TO263-7-1)" [mm] "User Library-TO263-7-1"
  rect 1.8x1.8 hole 1.1 mask+0.05: 1(-3.81,2.05)
  round 1.8 hole 1.1 mask+0.05: 2(-2.54,-2.25) 3(-1.27,2.05) 4(0,-2.25) 5(1.27,2.05) 6(2.54,-2.25) 7(3.81,2.05)
  silkscreen extent -5.2,-3.6 5.2,3.6, body extent -5,-2.56 5,2.37, height 13.68
"DO-35 vertical" [mm]
  rect 1.55x1.55 hole 1 paste-2539.97 mask+0: 1(-1.99,0)
  round 1.55 hole 1 paste-2539.97 mask+0: 2(1.99,0)
  silkscreen extent -0.95,-0.75 0.95,0.75, body extent -2.26,-0.75 2.74,0.75, height 6.25
DS1014-20 [mm]
  rect 1.5x1.5 hole 0.8 mask+0.05: 1(-9,1)
  round 1.5 hole 0.8 mask+0.05: 2(-9,-1) 3(-7,1) 4(-7,-1) 5(-5,1) 6(-5,-1) 7(-3,1) 8(-3,-1) 9(-1,1) 10(-1,-1) 11(1,1) 12(1,-1) 13(3,1) 14(3,-1) 15(5,1) 16(5,-1) 17(7,1) 18(7,-1) 19(9,1) 20(9,-1)
  silkscreen extent -13.6,-2.8 13.6,2.8, body extent -13.5,-2.75 13.5,2.7, height 5.65
GSIB-5S [mm]
  round 2.13 hole 1.42: 1(0,0) 2(10,0) 3(17.5,0) 4(25,0)
  silkscreen extent -3.1,-1.55 27.5,3.05, body extent -2.5,-1.55 27.5,3.05, height 24.6
HS15#1 [mil]
  round 124 / inner round 60 / far side round 124 hole 104 paste-99999 mask+0: 1(0,0) 2(562.99,625.98)
  silkscreen extent -527,-106 1005,731, body extent -439,-108 999,718, height 433
HS15#2 [mil]
  round 124 / inner round 60 / far side round 124 hole 104 paste-99999 mask+0: 1(0,0)
  round 124 / inner round 60 / far side round 124 hole 104.02 paste-99999 mask+0: 2(562.99,625.98)
  silkscreen extent -527,-106 1005,731, body extent -439,-108 999,718, height 433
LEPESTOK7750224 [mm]
  rrect50% 1.6x1.6 hole 0.9: 1(0,0)
PVG3A [mm]
  rect 1.1x0.9 smd: 1(1.15,-1.65) 3(-1.15,-1.65)
  rect 1.4x0.9 smd: 2(0,1.65)
  silkscreen extent -1.8,-2.7 1.8,1.7, body extent -1.8,-1.81 1.8,1.79, height 1.97
RES_AXIAL_VERTICAL_5mm [mm]
  rect 1.75x1.75 hole 1: 1(-2.5,0)
  round 1.75 hole 1: 2(2.5,0)
  silkscreen extent -5,-2.5 1.1,2.5, body extent -4.7,-2.15 2.95,2.15, height 14.42
Screw_M3 [mm]
  round 6 hole 3.5 unplated: 1(0,0)
  body extent -2.8,-2.79 2.8,2.79, height 2.38
SOT-23-3 [mm]
  rect 1.05x0.7 smd: 1(-1.15,0.95) 2(-1.15,-0.95) 3(1.15,0)
  silkscreen extent -1.68,-1.46 0.28,1.55, body extent -1.2,-1.46 1.2,1.46, height 1.2
SOT-23-6 [mm]
  rect 1.15x0.6 smd: 1(-1.3,0.95) 2(-1.3,0) 3(-1.3,-0.95) 4(1.3,-0.95) 5(1.3,0) 6(1.3,0.95)
  silkscreen extent -1.88,-1.5 0.38,1.6, body extent -1.43,-1.5 1.43,1.5, height 1.4
TO-220_HV_FET [mm]
  round 2 hole 1.2: 1(-2.5,1.25) 2(0,-1.25) 3(2.5,1.25)
  silkscreen extent -5.3,-0.75 5.3,3.75, body extent -5.34,-1.55 5.33,3.92, height 21.86
WOM [mm]
  round 1.55 hole 1: 1(-2.55,-2.55) 2(2.55,-2.55) 3(2.55,2.55) 4(-2.55,2.55)
  silkscreen extent -5,-5 5,5, body extent -4.43,-4.43 4.43,4.43, height 5.25
К73-17-A15 [mm]
  round 1.2 hole 1: 1(0,0) 2(15,0)
  silkscreen extent 1,-0.5 14,0.5

## Part data
C41 C42: "EHR-250B-47 мкФ, 105C,13x26"
DA2 DA3 DA5: "Isolated RS-485 Transceiver,  20 Mbps data rate, SOIC-16-W"
DA10: "12-Bit High Bandwidth / Multiplying DACs with Serial Interface 10-MSOP"
DA11 DA12 DA20: "30 V, Low Noise, Rail-to-Rail Input/Output, / Low Power Operational Amplifiers"
DA14: library part ADG433BR_1, "LC2MOS Precision Quad SPST Switches"
DA15 DA16: "High Voltage Power Operational Amplifier"
DA17: "LC2MOS Precision Quad SPST Switches"
DA18 DA19: "Dual, 16 MHz, Rail-to-Rail / FET Input Amplifier / 8-SOIC"
DA21 DA22: "High Perfomance Voltage Comparartor"
DD1 DD3: "Quad 2-Input NAND Gate High-Performance Silicon-Gate CMOS."
DD2: library part IN74HC20D_1, "Dual 4-input  NAND Gate CMOS"
R28 R29: "Резисторы постоянные непроволочные общего применения С2-33Н АИ, производитель \"АО\"НПО\"ЭРКОН\"", Диапазон значений номинальных сопротивлений="от 1 Ом до 3,01 МОм", Категории качества=«ОТК», Номинальная мощность рассеяния="0,125 Вт", Ряд сопротивлений="Е24, Е96", ТУ="ОЖО.467.173 ТУ"
RP1: "3362 -1/4 ˝ Square Trimpot® Trimming Potentiometer"
VD1 VD2 VD3 VD4 VD7: "Диод 1N4148"
VD10: "Диод W04M"
VD11: "Диод GSIB2540"
VD12 VD13: "Стабилитрон BZX79-C10V"
VT1: "MOSFET, N, SOT-23-6; Transistor Type: MOSFET; Transistor Polarity: N; Voltage, Vds Typ: 100V; Current, Id Cont: 1.5A;"
VT2: "P-Channel 100 V 0.35 Ohm Power MOSFET Surface Mount - SOT-23-6"
VT3 VT4: "Single N-Channel 100 V 8.3 mOhm 37 nC OptiMOS Power Mosfet - TO-220-3"
XP1: "IDC2-20MS DS1014 20 pin"
XP2 XP5 XP6: "Connector"
XP3 XP4: library part DS1021-1x3_1, "PLS-3, 2.54 pitch"
R1 R2 R3 R4 R5 R6 R7 R8 R9 R10 R11 R12 R13 R14 R15 R16 R17 R18 R19 R20 R21 R22 R23 R24 R25 R26 R27 R30 R31 R32 R33 R34 R35 R36 R37 R38 R39 R44 R45 R48 R49 R50 R51 R52 R53 R54 R55 R57 R58 R60 R61 R62 R63 R66 R67: ModelPrint=1206
R40 R41 R42 R43 R46 R47 R59: ModelPrint=2512
R64 R65: Диапазон значений номинальных сопротивлений="от 1 Ом до 3,01 МОм", Категории качества=«ОТК», Номинальная мощность рассеяния="0,125 Вт", Ряд сопротивлений="Е24, Е96", ТУ="ОЖО.467.173 ТУ"
R68 R69: Диапазон значений номинальных сопротивлений="от 0,1 Ом до 3,01 МОм", Категории качества=«ОТК», Номинальная мощность рассеяния="0,25 Вт", Ряд сопротивлений="Е24, Е96", ТУ="ОЖО.467.173 ТУ"

## Free pads (board coordinates)
  round 2.2 hole 1.2 mask+0.05: 1(81.339,139.606) 2(73.839,139.606) 3(66.338,139.606) 5(46.339,139.606) 6(38.838,139.606) 7(31.338,139.606)
  round 3.5 hole 1.8 mask+0.05: 4(90.585,91.568) 8(62.5,55) 9(62.5,47.5) 10(62.5,40) 11(62.5,32.5) 12(23.6,19.8) 12(49.6,8.1) 12(55,25.4) 12(62.5,25) 12(80.4,8.1)
  round 1 smd mask+0.5: R(2,2) R(2,148) R(98,2) R(98,148) R1(2,10) R1(2,140) R1(10,2) R1(10,148) R1(90,2) R1(90,148) R1(98,10) R1(98,140)
  round 3 hole 1.5 mask+0.05: TH(80,15) TH13(90,25) TH14(89.975,55) TH15(80,65)
  round 0 hole 3 unplated mask+0.05: TH5(96.736,91.568)
  round 0 hole 2 unplated mask+0.05: TH7(81.339,145.99) TH8(73.838,145.99) TH9(66.338,145.973) TH10(46.339,146.066) TH11(38.838,146.066) TH12(31.338,146.05)

## Via types
v1: diameter 0.6, hole 0.3, Top Layer to Bottom Layer, 332 vias

## Nets (pads, with @x,y where several pads share a name; then routed paths per layer and width w, separated by ;. In a path a pad name is that pad's centre, name@x,y a point inside that pad or via, vN(x,y) a via of type N, cw(c..) or ccw(c..) an arc to the next point about the centre after c; other vN are vias at no path point)
50E+: DA1.7 DD2.4 K1.3 | length 100
  Top Layer w0.2: DA1.7@14.912,31.235 16.735,31.235 20.8,35.3 20.8,38.4 v1(22,39.6) ; v1(37.5,85.8) 37.5,83.3 38.417,82.383 v1(44.776,82.383) ; v1(38.076,97.799) 41.13,100.854 DD2.4@41.13,102 ; v1(46.889,76.219) 46.895,76.214 46.895,64.705 v1(46.9,64.7)
  Bottom Layer w0.2: v1(22,39.6) 24.9,42.5 32.7,42.5 47.77,57.57 48.11,57.57 46.9,58.78 v1(46.9,64.7) ; v1(37.5,85.8) 37.5,97.224 v1(38.076,97.799) ; v1(44.776,82.383) 44.776,78.332 v1(46.889,76.219)
50E-: DA6.7 DD2.12 K2.3 | length 116
  Top Layer w0.2: DA6.7@14.912,24.235 16.735,24.235 22,29.5 v1(22,38.1) ; DD2.12@42.4,96.1 42.426,96.074 42.426,94.681 v1(42.452,94.655) ; v1(43.5,93.7) 45.2,93.7 v1(46.9,92) ; v1(47.4,78) 59.4,66 v1(59.4,56)
  Bottom Layer w0.2: v1(22,38.1) 25.7,41.8 36.5,41.8 38.779,44.079 44.621,44.079 45.9,42.8 47.88,42.8 K2.3@47.91,42.77 53.07,42.77 59.4,49.1 v1(59.4,56) ; v1(42.452,94.655) 42.498,94.655 43.453,93.7 v1(43.5,93.7) ; v1(46.9,92) 47.006,82.926 cw(c46.106,82.915) 47.006,82.9 46.953,79.694 46.9,78.666 46.9,78.5 46.959,78.441 v1(47.4,78)
50En+: DA1.2 XP1.15 | length 6.1
  Top Layer w0.2: XP1.15@4.3,29 4.433,29.133 5.233,29.133 6.7,30.6 8.015,30.6 8.65,31.235 DA1.2@9.488,31.235
50En-: DA6.2 XP1.16 | length 10.6
  Top Layer w0.2: XP1.16@2.3,29 3.3,28 5.8,28 6.4,27.4 6.4,24.9 7.065,24.235 DA6.2@9.488,24.235
70+: pad.9 VD11.1 | length 14
  Top Layer w2: VD11.1@53.7,57.9 59.2,52.4 59.2,50.8 pad.9@62.5,47.5
70-: pad.11 VD11.2 | length 19
  Top Layer w2: VD11.2@53.7,47.9 57.6,44 57.6,37.4 pad.11@62.5,32.5
+3.3n: C14.1 DA1.1 DA4.1 DA6.1 DA8.5 DA9.1 DA13.1 XP1.19 | length 50.8
  Top Layer w0.3: v1(7.256,22.598) 7.25,22.592 7.25,19.35 8.095,18.505 DA9.1@9.488,18.505 ; v1(7.4,29.5) v1(7.4,25.2) 7.481,25.2 7.784,25.502 9.486,25.502 DA6.1@9.488,25.505 ; v1(7.4,32.5) 8.875,32.5 DA1.1@9.488,32.505 ; v1(7.6,49.8) 7.6,49.719 7.15,49.269 7.15,47.506 7.381,47.276 7.381,46.657 v1(7.438,46.6) 7.438,45.662 7.7,45.4 8.4,45.4 8.7,45.1 9.483,45.1 DA8.5@9.488,45.105 ; v1(7.6,52.035) 7.681,52.035 8.046,52.4 9.483,52.4 DA4.1@9.488,52.405 ; v1(7.8,39.6) 7.803,39.603 8.875,39.603 8.875,39.43 DA13.1@9.488,39.605
  Bottom Layer w0.3: XP1.19@4.3,25 4.5,25.2 v1(7.4,25.2) ; v1(7.256,22.598) 7.256,23.853 7.4,23.997 7.4,25.158 v1@7.421,25.179 ; v1(7.4,29.5) 7.4,39.119 7.8,39.519 7.8,39.673 7.2,40.273 7.2,44.858 7.438,45.096 v1(7.438,46.6) ; v1(7.6,49.8) v1(7.6,52.035)
+5: C2.1 C8.1 C9.2 C10.2 C11.2 C12.1 C18.1 C20.1 C39.1 C48.2 C54.1 DA1.5 DA2.1 DA3.1 DA4.5 DA5.1 DA6.5 DA8.1 DA9.5 DA10.8 DA11.8 DA13.5 DA14.12 DA17.12 DD1.14 DD2.14 DD3.14 R5.1 R6.1 R7.1 R48.2 R55.1 R58.2 R60.2 XP6.3 | length 354.4
  Top Layer w0.2: 11.7,109.3 11.7,109.675 11.725,109.7 DA10.8@11.75,109.7 ; DA6.5@14.912,21.695 14.912,20.288 C12.1@15.1,20.1 ; DA1.5@14.912,28.695 14.912,27.288 C2.1@15.1,27.1 ; DA13.5@14.912,35.795 15.1,35.607 C20.1@15.1,34.1
  Top Layer w0.3: 11.7,109.3 12.45,108.55 13.211,108.55 14.45,107.311 14.45,106.323 15.773,105 v1(15.786,105) ; R5.1@14.3,97.6 v1(15.505,97.6) ; DA9.5@14.912,14.695 14.912,13.188 C18.1@15.1,13 15.8,13 16.381,13.581 16.381,13.981 v1@16.4,14 ; DA4.5@14.912,48.595 14.917,48.6 15.8,48.6 16.3,48.1 C8.1@17.1,48.1 ; v1@15.78,104.993 v1@15.786,104.986 ; v1@15.873,104.986 18.786,104.986 19.5,105.7 19.5,105.92 19.675,106.095 DA11.8@19.788,106.095 ; v1(16.296,14.104) v1@16.4,14 ; v1(16.618,45.968) 16.618,46.049 17.1,46.53 C8.1@17.1,48.1 ; DA2.1@18.945,94.828 18.945,94.859 19.086,95 19.524,95 19.7,95.176 C9.2@19.7,97.3 ; C9.2@19.75,97.3 v1(20.973,97.3) ; DA5.1@28.328,70.555 28.4,70.483 28.4,70.2 28.7,69.9 C11.2@30.8,69.9 v1(30.8,68.677) 30.8,65.7 26.9,61.8 R6.1@24.4,61.8 24.4,60.8 25.7,59.5 25.7,56.7 25.3,56.3 C10.2@24.2,56.3 24.1,56.4 23.6,56.4 23.6,56.5 22.986,57.114 21.769,57.114 DA3.1@21.728,57.155 21.728,55.528 19.2,53 19.2,49.1 18.2,48.1 C8.1@17.1,48.1 ; v1(30.8,73.877) R7.1@30.8,75.1 ; XP6.3@32.8,2.9 C39.1@32.8,9.4 29.3,9.4 24.7,14 v1@16.4,14 ; C48.2@38.165,70.335 C48.2@38.2,70.3 ; v1(38.165,72.15) DA14.12@38.165,73.788 ; 46.21,82.81 DD1.14@46.21,84.3
  Top Layer w0.5: DA8.1@14.912,41.295 14.915,41.298 16.248,41.298 v1(16.25,41.3) ; C12.1@15.1,20.1 v1(16.05,20.1) ; C2.1@15.1,27.1 v1(16.05,27.1) ; C20.1@15.1,34.1 15.181,34.181 16.181,34.181 v1(16.2,34.2) ; v1(34.5,69.1) 35.735,70.335 38.165,70.335 38.183,70.353 38.183,72.132 v1(38.165,72.15) ; C48.2@38.2,70.3 39.35,70.3 41,68.65 41,66.3 43.85,63.45 48.45,63.45 50.2,61.7 R55.1@50.2,58 50.354,57.846 51.407,57.846 51.7,57.554 51.7,53.9 v1(59.5,46.1) ; v1(40.77,72.153) 43.853,72.153 45,73.3 45,78.4 v1(45.9,79.3) ; DD2.14@44.94,96.1 44.94,97.8 50.74,103.6 ; v1(45.9,82.5) 46.21,82.81 46.3,82.9 v1(55.7,82.9) DD3.14@55.7,84.4 56.6,84.4 57.6,85.4 v1(57.6,87.7) ; R58.2@50.3,37.2 v1(51.7,37.2) ; DA17.12@50.74,106.1 50.74,103.6 ; v1(60.45,87) 68.773,87 69.173,87.4 v1(69.2,87.4) ; R48.2@82.2,99.325 82.2,98.1 81.9,97.8 80.2,97.8 79.5,97.1 79.5,94.2 79.3,94 72.198,94 71.955,93.758 71.955,92.955 R60.2@71.9,92.9 C54.1@69.9,92.9 69.9,91.525 69.394,91.019 69.219,91.019 v1(69.2,91) 65.736,91 65.436,90.7 62,90.7 60.951,91.749 60.951,93.389 60.65,93.689 60.65,96.662 60.951,96.963 60.951,101.507 60.658,101.8 52.54,101.8 50.74,103.6
  Bottom Layer w0.3: v1(15.786,105) 15.786,103.926 15.096,103.235 15.096,101.288 15.1,101.283 15.1,100.756 15.505,100.351 v1(15.505,97.6) 20.592,97.6 20.892,97.3 v1(20.973,97.3) 23.7,94.573 23.7,82.9 26.2,80.4 29.2,80.4 30.8,78.8 v1(30.8,73.877) v1(30.8,68.677) 34.077,68.677 v1(34.5,69.1) ; v1(16.05,20.1) 16.05,14.431 16.296,14.185 v1(16.296,14.104) ; v1(16.05,27.1) 16.05,20.239 v1@16.119,20.169 ; v1@16.119,27.169 16.05,27.239 16.05,32.994 16.257,33.201 16.257,34.143 v1(16.2,34.2) 16.2,41.25 v1(16.25,41.3) 16.2,41.35 16.2,45.468 16.618,45.886 v1(16.618,45.968)
  Bottom Layer w0.5: v1(38.165,72.15) v1(38.165,72.15) 40.769,72.152 v1(40.77,72.153) ; v1(45.9,79.3) v1(45.9,82.5) ; v1(51.7,37.2) 54.7,37.2 59.5,42 v1(59.5,46.1) ; v1(57.6,87.7) 58.3,87 v1(60.45,87) ; v1(69.2,87.4) v1(69.2,91)
+5n: C3.2 C4.2 C6.2 DA2.16 DA3.16 DA5.16 XP1.9 XP1.12 XP2.1 | length 92.2
  Top Layer w0.3: v1(10.1,55.2) C4.2@10.1,56.4 12.3,56.4 12.6,56.7 12.6,57.083 DA3.16@12.672,57.155 ; v1(14.3,67) 16.326,69.026 16.326,69.45 16.676,69.8 18.9,69.8 19.3,70.2 19.3,70.527 DA5.16@19.272,70.555 20.824,70.555 21.071,70.802 21.071,77.486 v1(21.017,77.54) ; DA2.16@18.945,85.772 18.973,85.8 19.5,85.8 19.7,85.6 19.7,82.081 19.4,81.781 v1(19.4,81.7)
  Bottom Layer w0.3: XP1.12@2.3,33 XP1.9@4.3,35 5.612,36.312 5.684,36.791 ccw(c4.3,37) 5.7,37 5.7,39 ccw(c4.3,39) 5.696,39.103 5.694,39.128 5.694,40.845 5.694,40.875 ccw(c4.3,41) 5.694,41.125 5.694,41.975 5.7,41.981 5.7,47.539 3.25,49.989 3.25,57.05 1.2,59.1 1.2,63.4 1.7,63.9 2.56,63.9 XP2.1@2.7,64.04 ; v1(10.1,55.2) 10.1,56.64 XP2.1@2.7,64.04 ; v1(14.3,67) 13.5,66.2 11.3,66.2 9.3,68.2 5.585,68.2 2.7,65.315 XP2.1@2.7,64.04 ; v1(19.4,81.7) 19.4,79.157 v1(21.017,77.54)
+15: C13.1 C26.2 C38.1 C43.1 C45.2 C47.2 C50.2 DA7.2 DA12.8 DA14.4 DA16.3 DA17.4 DA18.8 DA19.8 DA20.8 DA21.8 DA22.8 R14.2 R44.1 | length 375.5
  Top Layer w0.3: v1(3.988,131.03) 5.459,132.5 v1(14.6,132.5) ; v1(6.6,100.3) 6.661,100.3 7.161,100.8 7.161,101.689 C43.1@7.15,101.7 v1(9.6,101.7) ; v1(14.1,101.7) 14.109,101.691 16.036,101.691 v1(16.046,101.681) ; v1(16.6,131.505) 18.495,131.505 19.6,130.4 19.6,125.3 18.297,123.997 16.89,123.997 DA19.8@16.888,123.995 ; 21.7,102.878 v1(21.7,103.3) ; C47.2@23.05,8.7 v1(24.273,8.7) ; DA12.8@23.412,103.305 23.409,103.302 21.702,103.302 v1(21.7,103.3) ; v1(31.1,94.2) 26.731,94.2 23.144,97.787 21.757,99.174 21.757,103.243 v1(21.7,103.3) ; v1(36,81.4) 36.05,81.35 38.662,81.35 39.418,80.594 ; DA14.4@39.435,79.212 39.418,79.229 39.418,80.594 ; DA17.4@52.005,111.529 52,111.524 52,110.5 52.4,110.1 57.089,110.1 v1(57.1,110.111) ; DA17.4@52.01,111.524 52.185,111.699 52.185,112.297 52.2,112.312 v1(52.2,128.9) ; v1(53.9,92.2) 53.9,94.6 56.115,96.815 57.561,96.815 DA22.8@57.576,96.83 ; v1(58,108.3) 60.365,105.935 v1(67.508,105.935) 67.523,105.95 69.869,105.95 70.25,106.331 70.476,106.62 DA18.8@71.088,106.795 ; v1(63.9,91.8) 66.6,94.5 69.9,94.5 70.988,95.588 v1(70.988,96.472) DA20.8@70.988,97.695 ; DA21.8@74.276,88.56 68.523,88.56 68.27,88.813 63.797,88.813 63.61,89 59.156,89 59.014,88.857 58.657,88.857 v1(58.6,88.8) 58.6,83.961 55.989,81.35 40.174,81.35 39.418,80.594
  Top Layer w0.5: R14.2@4,129.9 v1@4,131.03 ; v1(6.8,117) C13.1@6.8,115.9 6.96,116.06 8.713,116.06 DA7.2@8.788,116.135 ; C38.1@23,3.2 23,6.7 23.15,6.85 23.3,7 R44.1@27.4,7 ; C50.2@23,7 C47.2@23,8.7 ; C45.2@23,10.4 v1(24.2,10.4) ; C26.2@40.1,132.1 40.115,132.085 40.115,129.565 DA16.3@40.13,129.55
  Bottom Layer w0.3: v1(9.6,101.7) v1(14.1,101.7) ; v1(14.6,132.5) 15.595,131.505 v1(16.6,131.505) ; v1(16.046,101.681) 17.664,103.3 v1(21.7,103.3) ; v1(31.1,94.2) 33.1,94.2 33.6,93.7 33.6,83.139 35.339,81.4 v1(36,81.4) ; DA16.3@40.13,129.55 42.08,131.5 49.6,131.5 v1(52.2,128.9) ; v1(53.9,92.2) 57.3,88.8 v1(58.6,88.8) ; v1(57.1,110.111) 58.011,109.2 58.011,108.311 v1(58,108.3) ; v1(63.878,88.813) 63.889,88.824 63.889,91.789 v1(63.9,91.8) ; v1(67.508,105.935) 67.5,105.927 67.5,99.96 v1(70.988,96.472)
  Bottom Layer w0.5: v1(3.988,131.03) 3.988,125.112 6.8,122.3 6.8,100.527 6.6,100.327 v1(6.6,100.3) 5.7,99.4 5.7,90.6 11,85.3 14.4,85.3 18.2,81.5 18.2,73.2 20.2,71.2 23.3,71.2 28.2,66.3 28.2,57.4 20.9,50.1 20.9,14 v1(23,11.9) 24.273,10.627 v1(24.273,8.7)
+70: pad.1 pad.12@55,25.4 VT1.1 VT1.2 VT1.5 VT1.6 | length 142.6
  Bottom Layer w2: pad.12@55,25.4 59.9,20.5 67.5,20.5 84.4,37.4 84.4,60.677 83.55,61.527 83.55,84.803 84.4,85.653 84.4,124.295 83.4,125.295 83.4,133.247 81.339,135.308 pad.1@81.339,139.606
+100: C30.2 C41.2 DA15.3 R46.2 R67.1 | length 136.1
  Top Layer w1: DA15.3@72.73,129.75 72.765,129.785 72.765,134.065 C30.2@72.8,134.1
  Top Layer w2: R67.1@37.8,47.1 38.46,47.76 46.672,47.76 ; R46.2@74.2,65.583 74.2,72.9 C41.2@78.8,77.5
  Bottom Layer w2: 44.464,47.76 47.56,47.76 61.5,61.7 72.9,61.7 74.2,63 74.2,68.5 ; DA15.3@72.73,129.75 72.73,132.128 73.902,133.3 79.528,133.3 80.7,132.128 80.7,124.176 81.7,123.176 81.7,86.772 80.85,85.922 80.85,79.8 C41.2@78.85,77.8
  other v1: 44.4,47.2 46.4,47.2 44.4,48.2 46.4,48.2 73.7,67.7 74.7,67.7 73.7,68.7 74.7,68.7
-15: C31.1 C40.2 C44.1 C46.1 C49.1 C51.1 DA12.4 DA14.13 DA15.4 DA17.13 DA18.4 DA19.4 DA20.4 DA21.4 DA22.4 R17.1 R45.1 | length 407.6
  Top Layer w0.3: C44.1@1.15,101.7 v1(1.15,100.477) 1.15,98.85 3.5,96.5 8.136,96.5 8.8,97.164 8.8,99.135 v1(9.65,99.985) ; v1(1.692,120.16) 1.692,130.892 4.7,133.9 v1(19.4,133.9) ; v1(14.163,100.6) 15.256,100.6 16.361,99.495 DA12.4@17.988,99.495 20.305,99.495 29.5,90.3 29.5,82.224 30.945,80.613 30.956,80.601 v1(31.704,79.854) ; v1(14.277,7) C51.1@15.5,7 ; v1(14.277,8.9) C46.1@15.5,8.9 ; v1(21.2,132.1) 22.3,131 22.3,127.817 DA19.4@22.312,127.805 ; DA14.13@39.435,73.788 39.435,71.959 v1(40.336,71.057) ; v1@40.392,71.112 40.446,71.057 44.03,71.057 45.9,72.927 45.9,77.843 47.907,79.85 56.611,79.85 61.461,84.7 76.2,84.7 76.9,85.4 76.9,91 v1(78.3,92.4) 78.315,92.385 79.685,92.385 DA21.4@79.7,92.37 ; DA17.13@52.01,106.1 52.006,106.096 52.006,104.094 53.3,102.8 62.063,102.8 63,101.863 ; DA22.4@63,100.64 63,101.863 ; v1(72.5,103.2) 71.609,103.2 71.459,103.35 70.65,103.35 70.242,102.942 64.079,102.942 63,101.863 ; C31.1@74,121.6 75.3,121.6 75.6,121.3 75.6,115.7 74,114.1 74,111.6 v1@74.995,110.605 ; v1(75.1,110.6) 75.102,110.602 76.51,110.602 DA18.4@76.512,110.605 ; v1(75.4,103.2) 76.2,103.2 76.5,102.9 ; v1(77.8,101.5) 77.797,101.502 76.415,101.502 DA20.4@76.412,101.505 76.412,101.592 76.5,101.68 76.5,102.9 ; v1(77.9,104.7) 77.87,104.67 77.87,104.27 76.5,102.9
  Top Layer w0.5: v1(1.7,114.6) R17.1@1.7,115.8 ; v1(14.277,10.6) C49.1@15.5,10.6 ; C51.1@15.5,7 C40.2@15.5,3.3 15.5,1.4 16.4,0.5 40.7,0.5 43,2.8 43,6.8 42.7,7.1 R45.1@41.3,7.1 ; C31.1@74,121.6 DA15.4@74,125.45
  Bottom Layer w0.3: v1(1.7,114.6) v1@1.7,120.16 ; v1(9.65,99.985) 10.265,100.6 v1(14.163,100.6) ; v1(19.4,133.9) v1(21.2,132.1) ; v1(31.704,79.854) 31.7,79.85 31.7,75.1 35.743,71.057 v1(40.336,71.057) ; v1(72.5,103.2) v1(75.4,103.2) ; v1(75.1,110.6) 77.897,107.803 77.897,104.703 v1(77.9,104.7) ; v1(77.8,101.5) 77.8,92.961 78.3,92.461 v1(78.3,92.4)
  Bottom Layer w0.5: v1(1.7,114.6) 1.15,114.05 v1(1.15,100.477) 1.15,90.35 9.6,81.9 12.8,81.9 13.8,80.9 13.8,70.5 16.3,68 20.7,68 25.1,63.6 25.1,58.484 18.2,51.584 18.2,14 16.9,12.7 16.377,12.7 v1(14.277,10.6) v1(14.277,8.9) v1(14.277,7)
-70: pad.7 pad.12@80.4,8.1 R40.1 VD8.1 | length 199
  Bottom Layer w2: pad.7@31.338,139.606 34.532,142.8 83.5,142.8 84.399,141.901 86.1,140.2 86.1,126.413 87.1,125.413 87.1,82.575 86.25,81.725 86.25,68.275 94.1,60.425 94.1,21.8 pad.12@80.4,8.1
-100: C29.1 C42.1 DA16.4 R47.2 | length 74
  Top Layer w2: C29.1@41.4,122.281 DA16.4@41.4,125.25 ; C42.1@64.65,77.45 69.093,73.007 R47.2@69.093,65.6
  Bottom Layer w2: DA16.4@41.4,125.25 41.4,121.9 44.3,119 44.3,103.7 51.3,96.7 51.3,90.8 C42.1@64.6,77.5
CLK_DA2: DA3.3 DA10.4 | length 58.5
  Top Layer w0.2: v1(9.3,93.5) 9.3,88.446 9.2,88.346 9.2,83.4 10.7,81.9 12.2,81.9 12.85,81.25 12.85,69.85 v1(12.9,69.8) ; v1(9.7,96.7) 9.7,98.3 12.15,100.75 v1(12.15,104.1) 12.175,104.125 12.175,105.825 DA10.4@12.2,105.85 ; DA3.3@21.728,59.695 v1@23.7,59.695
  Bottom Layer w0.2: v1(9.3,93.5) 9.3,96.251 9.7,96.651 v1(9.7,96.7) ; v1(12.9,69.8) 15.6,67.1 19.5,67.1 23.7,62.9 v1(23.7,59.7)
DAT_DA2: DA2.3 DA10.5 | length 13.6
  Top Layer w0.2: DA10.5@12.7,105.85 12.7,103.625 12.5,103.425 12.5,100.7 14.2,99 14.766,99 15.016,98.75 15.886,98.75 16.405,98.231 DA2.3@16.405,94.828
EIMP: DA9.7 DA17.9 DA17.16 DD2.5 DD2.13 | length 127.1
  Top Layer w0.2: DA9.7@14.912,17.235 16.935,17.235 22.6,22.9 22.6,50.9 27.9,56.2 27.9,59.7 33.5,65.3 33.5,83.5 v1(36.9,86.9) ; v1(36.9,92.5) 37.7,93.3 42.1,93.3 43.67,94.87 DD2.13@43.67,96.1 ; v1(36.9,97.9) 38.019,99.019 38.517,99.019 39.86,100.362 DD2.5@39.86,102 39.86,103.86 42.1,106.1 DA17.9@46.93,106.1 v1(46.93,107.304) ; v1(55.3,107.8) 55.82,107.28 DA17.16@55.82,106.1
  Bottom Layer w0.2: v1(36.9,86.9) v1(36.9,97.9) ; v1(46.93,107.304) 46.939,107.304 47.436,107.8 v1(55.3,107.8)
EIMPn: DA9.2 XP1.17 | length 12.9
  Top Layer w0.2: XP1.17@4.3,27 6,25.3 6,19.1 7.35,17.75 ; 7.347,17.753 7.865,17.235 DA9.2@9.488,17.235
ENB_DA2: DA4.7 DA10.6 DD3.5 | length 124.1
  Top Layer w0.2: v1(8.5,67.25) 8.577,67.327 8.577,67.777 9.3,68.5 12.122,68.5 12.3,68.678 12.3,81.2 12,81.5 10.4,81.5 8.7,83.2 v1(8.7,92.9) ; v1(12.7,111.6) 12.7,109.725 12.75,109.675 13.425,109.675 15.4,107.7 v1(15.4,106.8) ; v1(13.3,55.6) 13.31,55.6 13.8,55.11 13.8,51.3 13.965,51.135 DA4.7@14.912,51.135 ; v1(20.3,104.97) 26.421,104.97 26.951,105.5 v1(27,105.5) ; v1(31.301,104.4) 32.601,103.1 v1(34.7,103.1) ; v1(36.5,104.4) 36.55,104.45 39.267,104.45 39.741,104.924 v1(39.783,104.924) ; v1(46.8,97.9) 46.907,97.9 50.62,94.187 DD3.5@50.62,90.3
  Bottom Layer w0.2: v1(8.5,67.25) 8.69,66.71 8.807,66.593 11.5,63.9 11.5,57.4 v1(13.3,55.6) ; v1(8.7,92.9) 8.7,107.6 v1(12.7,111.6) ; v1(15.4,106.8) 17.483,104.517 17.6,104.4 17.683,104.4 19.8,104.4 20.3,104.9 v1(20.3,104.97) ; v1(27,105.5) 27.6,104.9 30.801,104.9 v1(31.301,104.4) ; v1(34.7,103.1) 34.808,103.1 35.178,103.47 35.32,103.47 35.88,104.03 36.022,104.03 36.392,104.4 v1(36.5,104.4) ; v1(39.783,104.924) 39.783,104.92 46.8,97.904 v1(46.8,97.9)